# Altium PCB EyeGait.PcbDoc
Units mm, origin at the board's own origin, x right, y up, seen from the top; angles counter-clockwise.
Board outline 30 x 30 mm, 4 copper layers (Top Layer, GND, VCC, Bottom Layer), stack 1.616 mm thick; 46 components, 38 nets, 185 pads, 5 vias.
Unrouted connection lines stored in the file: 124.
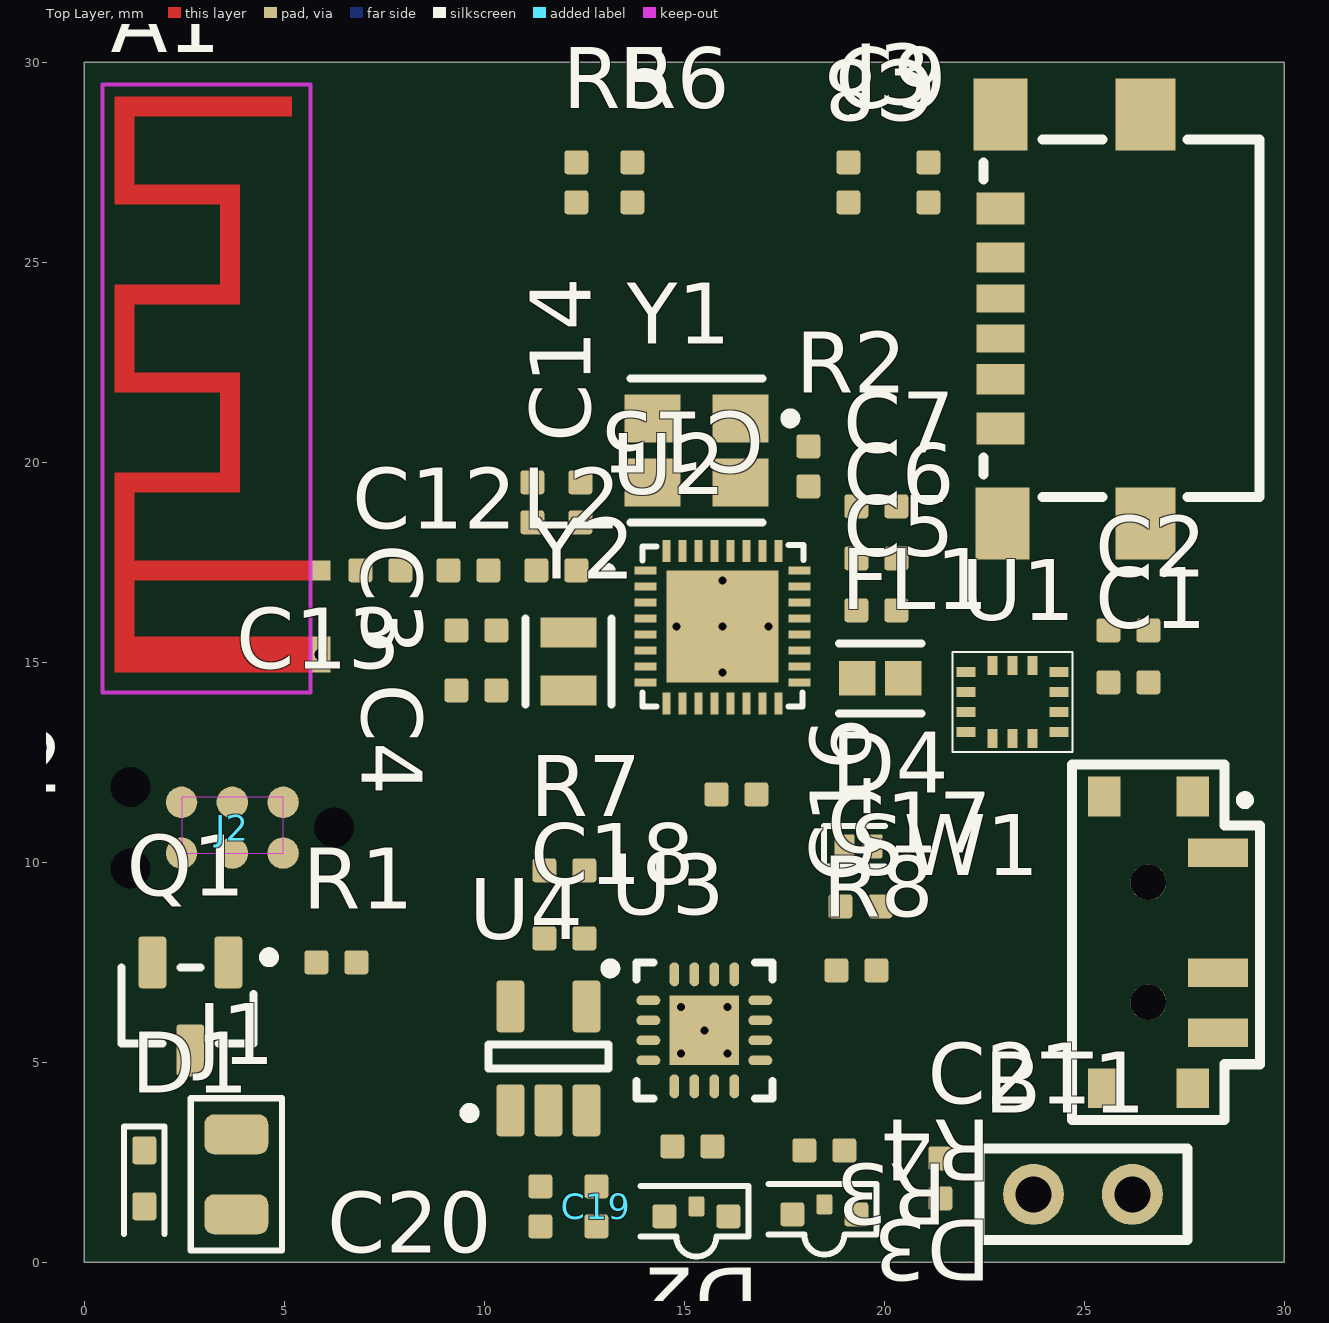
[diagram p0: Top Layer view]
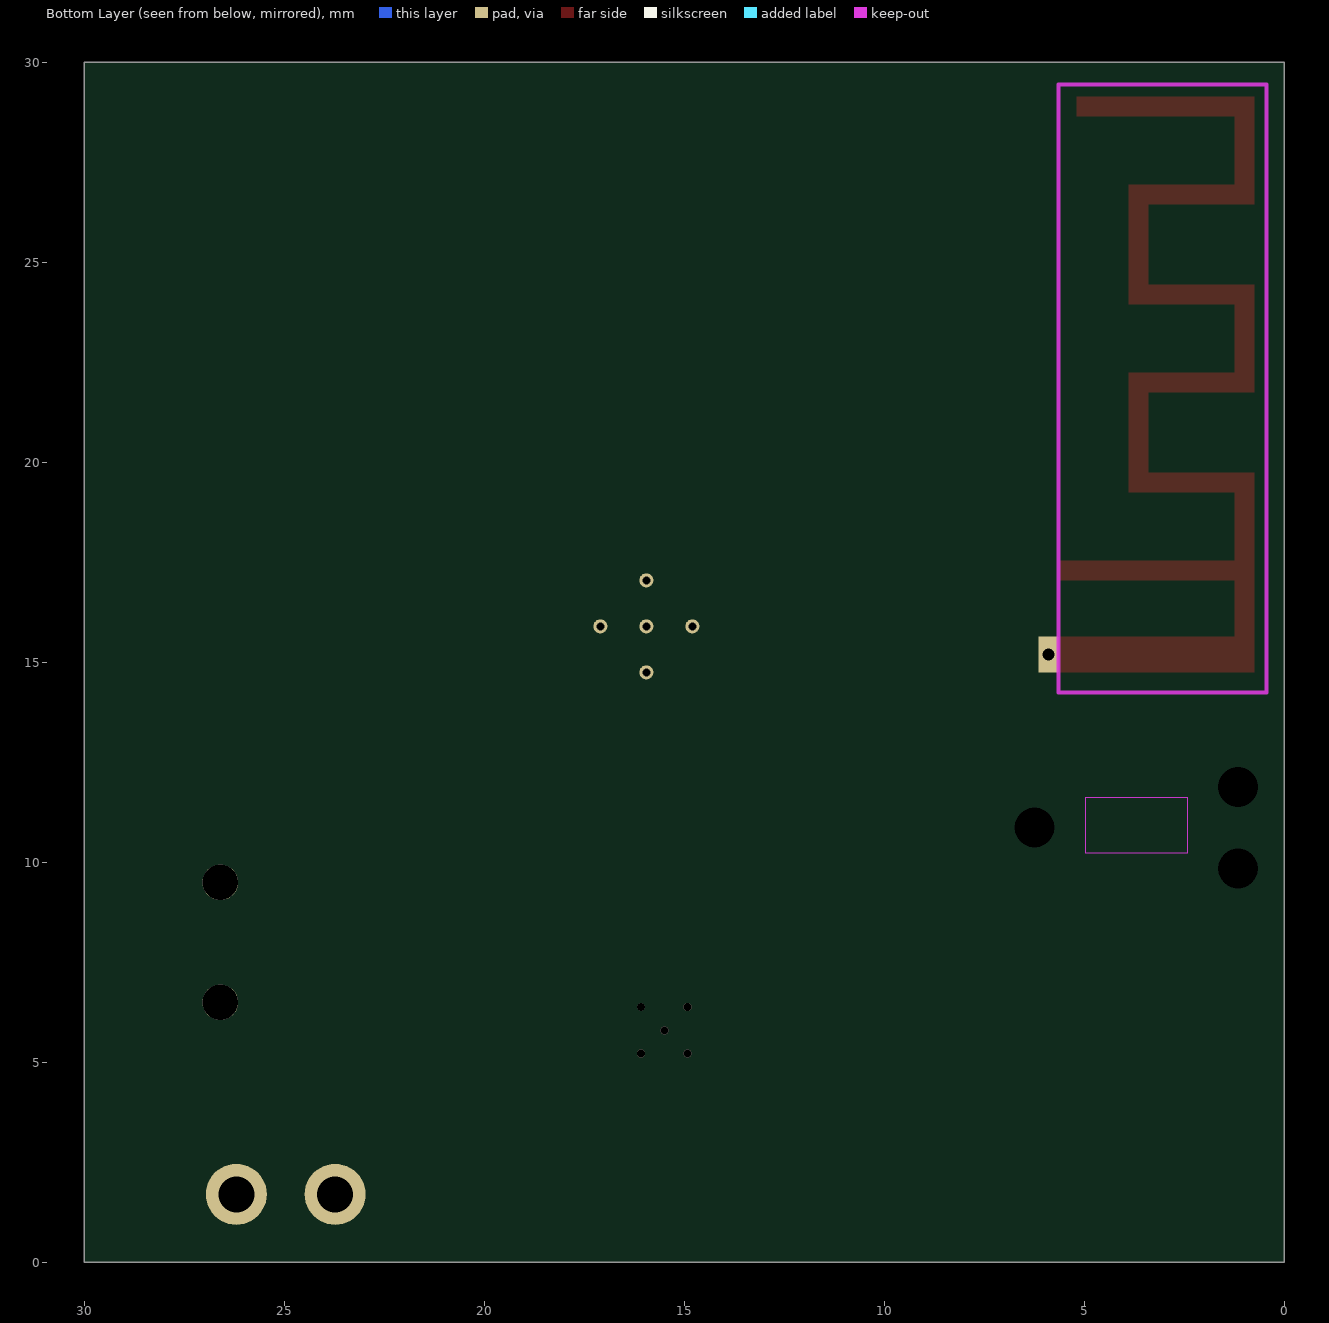
[diagram p1: Bottom Layer view, seen from below]
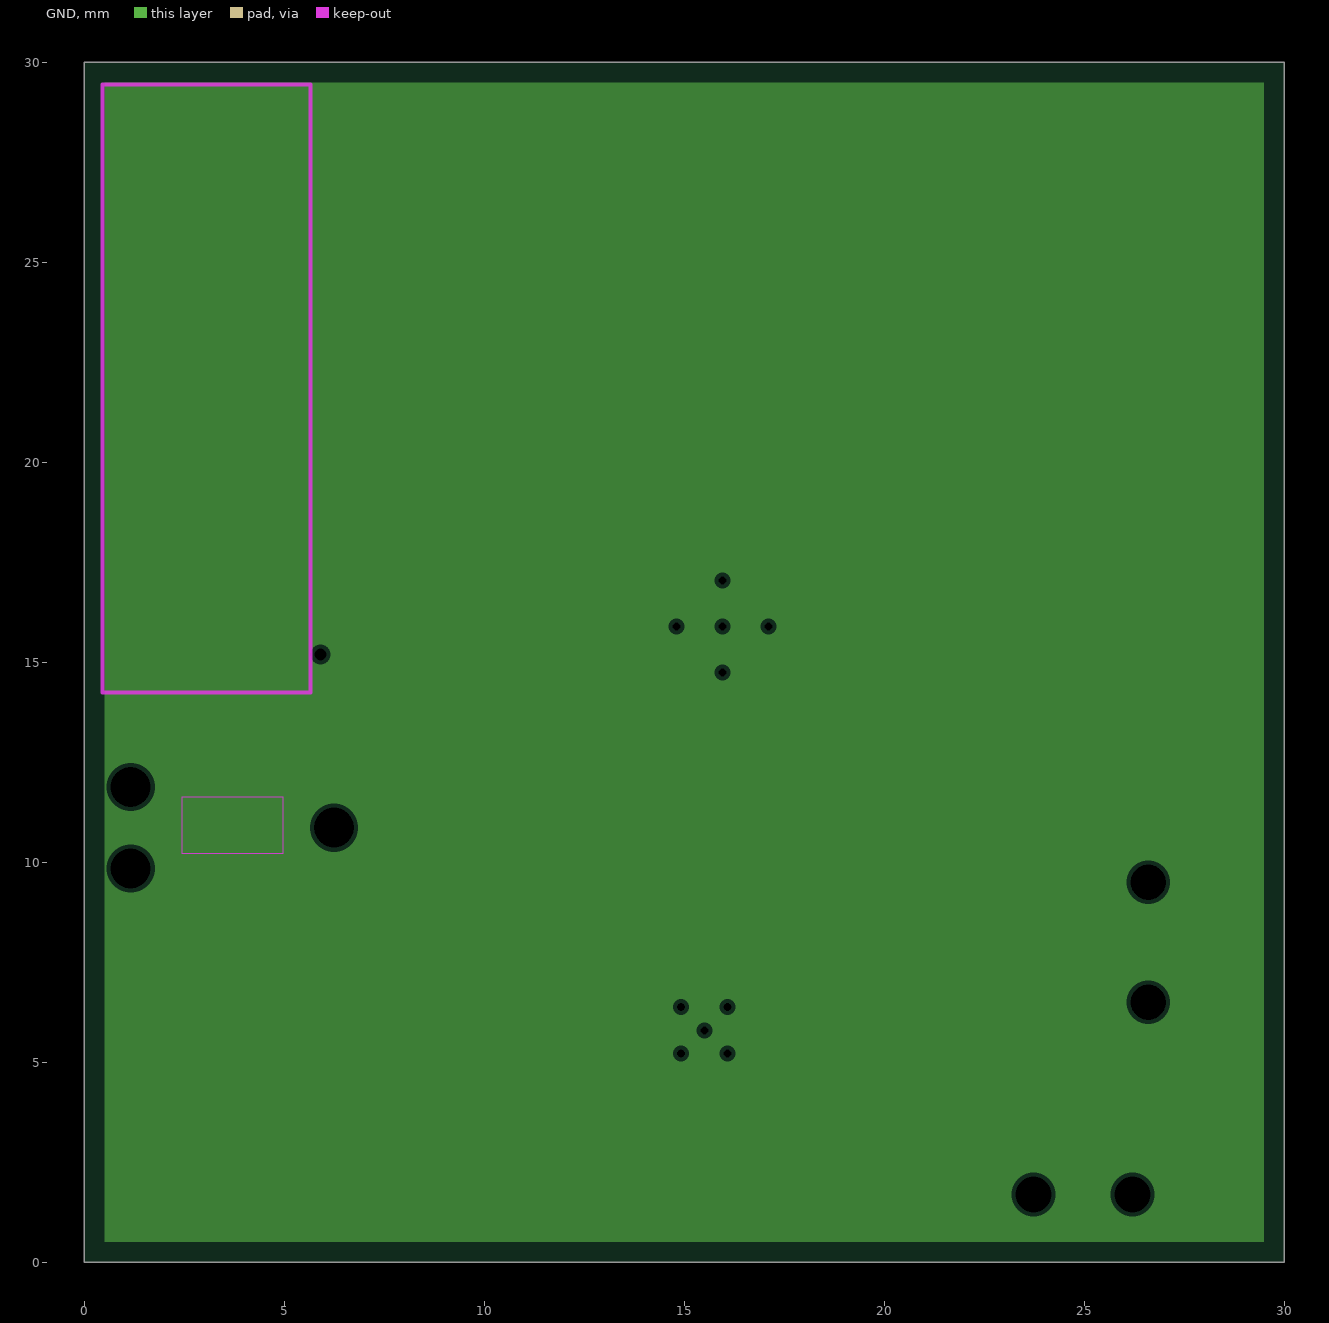
[diagram p2: GND, clearances drawn from the general rule]
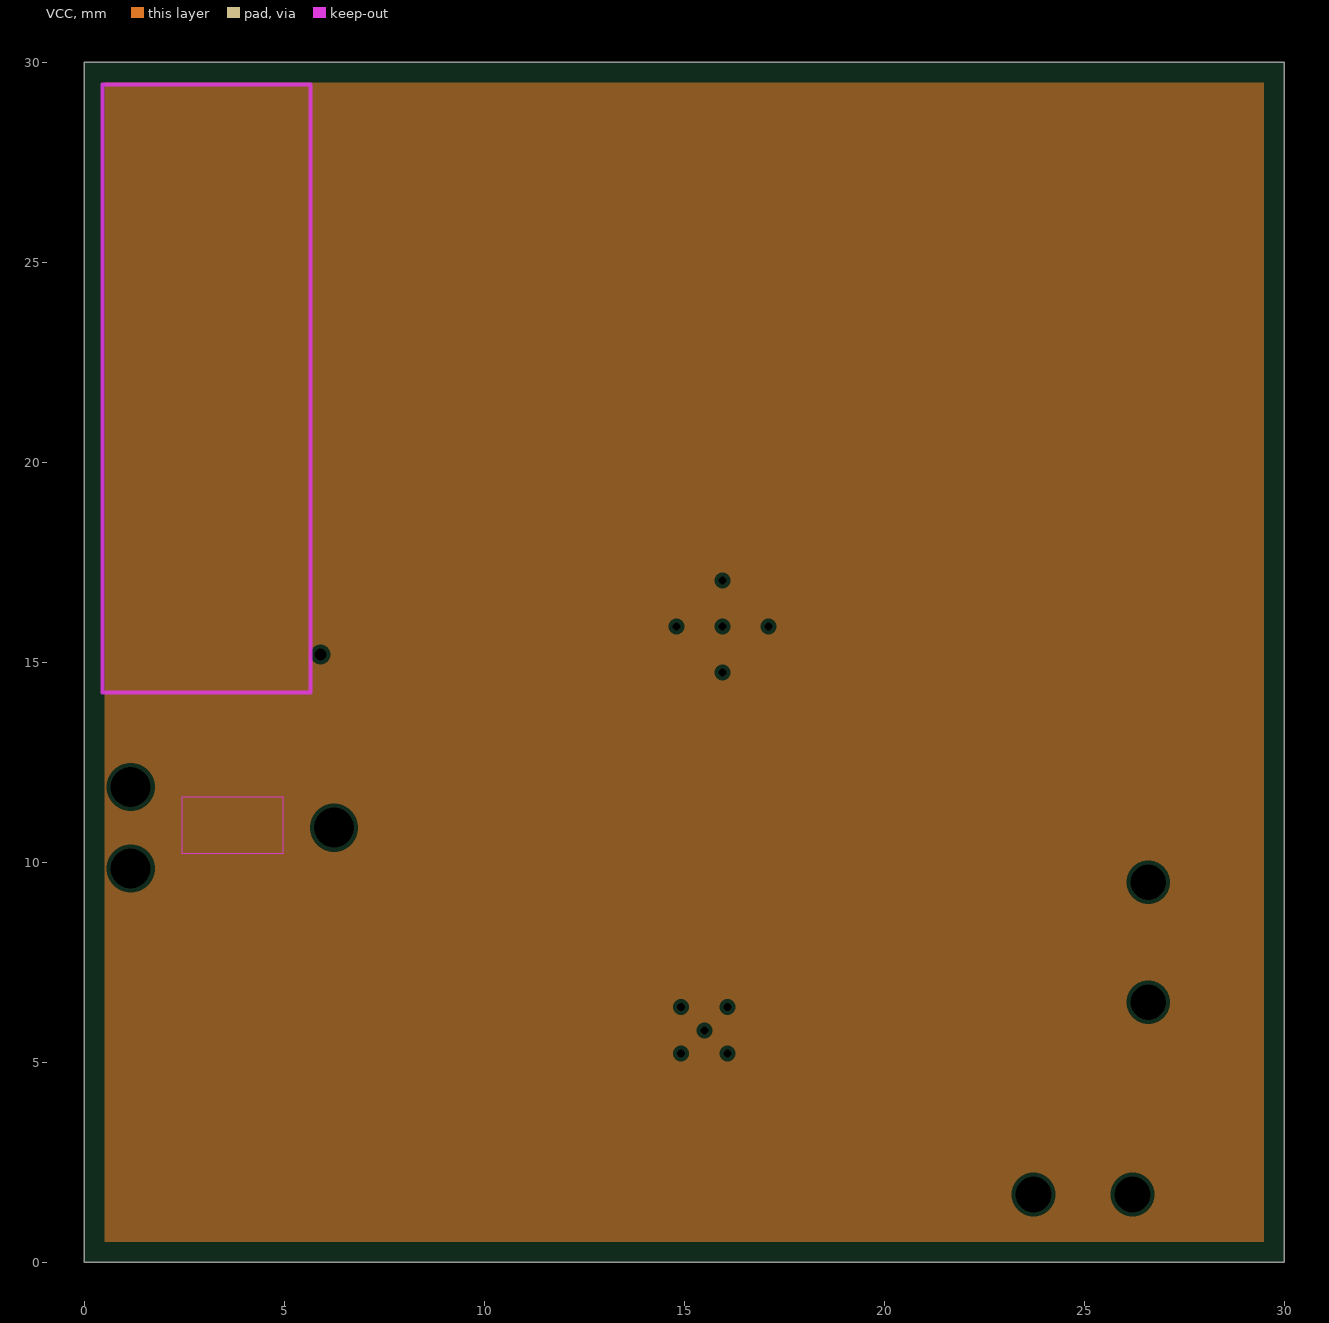
[diagram p3: VCC, clearances drawn from the general rule]

## Layer stack, top to bottom
Top Solder: solder mask 0.0102, Solder Resist, Dk 3.5
Top Layer: signal copper 0.0356
Dielectric 2: prepreg 0.137, PP-006, Dk 4.1
GND: plane copper 0.0356
Dielectric 1: dielectric 1.2, FR-4, Dk 4.8
VCC: plane copper 0.0356
Dielectric 3: prepreg 0.137, PP-006, Dk 4.1
Bottom Layer: signal copper 0.0356
Bottom Solder: solder mask 0.0102, Solder Resist, Dk 3.5

## Board outline
0,0 0,30 30,30 30,0

## Design rules (kind name [scope] priority, off if disabled: settings)
BoardOutlineClearance [All] p1: gap=0.2 ignorepadtopadclearanceinfootprint=FALSE
Clearance [All] p1: gap=0.102 ignorepadtopadclearanceinfootprint=TRUE except(0.1: Arc-Arc Arc-Track Track-Track; 0.127: Arc-Via Track-Via SMDPad-Via THPad-Via Via-Via Via-Fill Via-Poly Via-Region Via-Text; 0.254: Arc-Hole Track-Hole SMDPad-Hole THPad-Hole Via-Hole Fill-Hole Poly-Hole Region-Hole Text-Hole)
ComponentClearance [All] p1: gap=0.102 collisioncheckmode=3 verticalgap=0.102 showdistances=TRUE
DiffPairsRouting [All] p1: maxlimit=0.102 minlimit=0.102 mostfreqgap=0.102 toplayer_minwidth=0.102 toplayer_maxwidth=1816.048 toplayer_prefwidth=0.102 bottomlayer_minwidth=0.102 bottomlayer_maxwidth=1816.048 bottomlayer_prefwidth=0.102 maxuncoupledlength=12.7
Height [All] p1: minheight=0 maxheight=1816.048 prefheight=12.7
HoleSize [All] p1: absolutevalues=TRUE maxlimit=6.3 minlimit=0.2 maxpercent=80.000 minpercent=20.000
HoleToHoleClearance [All] p1: gap=0.406 allowstackedmicrovias=FALSE
MinimumAnnularRing [All] p1: minimumring=0.152
MinimumSolderMaskSliver [All] p1: minsoldermaskwidth=0.152
PlaneClearance [All] p1: clearance=0.102
PlaneConnect PlaneConnectPowerPads [InPadClass('PowerPads')] p1: planeconnectstyle=Direct reliefexpansion=0.508 reliefentries=4 reliefconductorwidth=0.254 reliefairgap=0.254
PlaneConnect [All] p2: pad.planeconnectstyle=Relief pad.reliefexpansion=0.3 pad.reliefentries=4 pad.reliefconductorwidth=0.102 pad.reliefairgap=0.102 via.planeconnectstyle=Direct via.reliefexpansion=0.3 via.reliefentries=4 via.reliefconductorwidth=0.127 via.reliefairgap=0.127
PolygonConnect PolygonConnectPowerPads [All vs (InPadClass('PowerPads'))] p1: connectstyle=Direct reliefconductorwidth=0.254 reliefentries=4 polygonreliefangle="90 Angle" airgapwidth=0.254
PolygonConnect [All] p2: thpad.connectstyle=Relief thpad.reliefconductorwidth=0.102 thpad.reliefentries=4 thpad.polygonreliefangle="90 Angle" thpad.airgapwidth=0.102 smdpad.connectstyle=Relief smdpad.reliefconductorwidth=0.102 smdpad.reliefentries=4 smdpad.polygonreliefangle="90 Angle" smdpad.airgapwidth=0.102 via.connectstyle=Direct via.reliefconductorwidth=0.127 via.reliefentries=4 via.polygonreliefangle="90 Angle" via.airgapwidth=0.127
RoutingVias [All] p1: holewidth=0.2 width=0.45 viastyle="Through Hole" minholewidth=0.2 minwidth=0.45 maxholewidth=6.3 maxwidth=6.55
SilkToSilkClearance [All] p1: silktosilkclearance=0.127
SilkToSolderMaskClearance [IsPad] p1: minsilkscreentomaskgap=0.127 clearancetoexposedcopper=TRUE
SolderMaskExpansion [All] p1: expansion=0.051 istentingtop=FALSE
UnRoutedNet [All] p1: checkbadconnections=TRUE
Width Power_20mil [All] p1: maxlimit=25.4 minlimit=0.508 preferedwidth=0.508 minimp=50.000000 maximp=50.000000 favimp=50.000000
Width Power_12mil [All] p2: maxlimit=25.4 minlimit=0.305 preferedwidth=0.305 minimp=50.000000 maximp=50.000000 favimp=50.000000
Width Width_10mil [All] p3: maxlimit=25.4 minlimit=0.254 preferedwidth=0.254 minimp=50.000000 maximp=50.000000 favimp=50.000000
Width Width_6mil [All] p4: maxlimit=25.4 minlimit=0.152 preferedwidth=0.152 minimp=50.000000 maximp=50.000000 favimp=50.000000
Width Width_4mil [All] p5: maxlimit=25.4 minlimit=0.102 preferedwidth=0.102 minimp=50.000000 maximp=50.000000 favimp=50.000000
19 further rules are at their usual default settings.

## Classes and differential pairs
component class Sensors&Actuators: C1 C2 D1 J1 Q1 R1 U1
component class Power: BT1 C17 C18 C19 C20 C21 D2 D3 D4 J3 R3 R4 R5 R6 R7 R8 SW1 U3 U4
component class MCU: A1 C3 C4 C5 C6 C7 C8 C9 C12 C13 C14 C15 C16 FL1 J2 L2 R2 U2 Y1 Y2

## Components (designator, comment, footprint, x,y, rotation, side; value= is the part's Value field where it differs from the comment)
A1 "Antena_IFA" ANTENA_IFA 5.65,14.75 r90 top
BT1 "Battery" "Hand Solder Cable" 23.73,1.7 r0 top
C1 "100 nF" C0402 26.1,14.5 r0 top
C2 "100 nF" C0402 26.1,15.8 r0 top
C3 "15 pF" C0402 9.8,15.8 r0 top
C4 "15 pF" C0402 9.8,14.3 r0 top
C5 "100 nF" C0402 19.8,16.3 r0 top
C6 "100 nF" C0402 19.8,17.6 r0 top
C7 "10 uF" C0402 19.8,18.9 r0 top
C8 "100 nF" C0402 21.1,27 r90 top
C9 "10 uF" C0402 19.1,27 r90 top
C12 "12 pF" C0402 9.6,17.3 r180 top
C13 "12 pF" C0402 7.4,17.3 r180 top
C14 "1.2 pF" C0402 11.2,19 r270 top
C15 "1.2 pF" C0402 12.4,19 r270 top
C16 "1 uF" C0402 16.3,11.7 r180 top
C17 "1uF" C0402 19.4,8.9 r0 top
C18 "1uF" C0402 12,8.1 r180 top
C19 "4.7uF" C0402 12.8,1.4 r270 top
C20 "1uF" C0402 11.4,1.4 r270 top
C21 "4.7uF" C0402 21.4,2.1 r90 top
D1 "BAT43XV2" SOD_523 1.5,2.1 r270 top
D2 "155060RS73200" LED_Side_0603 15.3,1.15 r180 top
D3 "155060GS73200" LED_Side_0603 18.5,1.2 r180 top
D4 "PESD7V0L1BSLAZ" DFN1006-2/SOD882 19,10.4 r0 top
FL1 "BLM18HE152SN1D" FP-BLM18-0_15-t0_8-IPC_C 19.9,14.6 r180 top
J1 "Motor" Motor 3.8,2.2 r270 top
J2 "Conn2x3" Pogo_6pins_minimum 6.24,10.865 r180 top
J3 "USB_C_6" USB4135-GF-A 22.955,18.475 r90 top
L2 "2 nH" L0402 11.8,17.3 r180 top
Q1 "S8050" SOT23 3.6,7.5 r180 top
R1 "5.1 K" R0402 6.3,7.5 r180 top
R2 "100 k" R0402 18.1,19.9 r270 top
R3 "220" R0402 15.2,2.9 r0 top
R4 "220" R0402 18.5,2.8 r0 top
R5 "5.1K" R0402 12.3,27 r90 top
R6 "5.1K" R0402 13.7,27 r90 top
R7 "10K" R0402 12,9.8 r180 top
R8 "18K" R0402 19.3,7.3 r180 top
SW1 "PCM12SMTR" PCM12SMTR 26.6,8 r270 top
U1 "LSM6DSM-LGA-14L" LSM6DSM-LGA-14L-v2 21.7,12.762 r0 top
U2 "CC2640" CC2640R2FRSM 15.95,15.9 r0 top
U3 "BQ24232" QFN50P300X300X100_HS-17N 15.5,5.8 r0 top
U4 "MIC5504-3.3YM5-TR" SOT23-5 12.55,6.4 r180 top
Y1 "ABM8AIG-24.000MHZ-12-2Z-T3" FP-ABM8AIG-MFG 15.3,20.3 r180 top
Y2 "ABS06-32.768KHZ-9-1-T" FP-ABS06-MFG 12.1,15.025 r270 top

## Footprints (in the part's own frame and the unit in brackets; to place one, negate y for a bottom-side part, rotate by r counter-clockwise, add the part's x,y. Pads: shape width x height; smd on the part's side, far side on the other; paste and mask are expansions set on the pad)
ANTENA_IFA [mm]
  rect 0.5x0.5 smd mask+0.102: 0(2.55,-0.25)
  rect 0.9x0.5 hole 0.3 mask+0.102: 1(0.45,-0.25)
  Top Layer region: 5,1.76 7,1.76 7,2.26 5,2.26
  Top Layer region: 4.5,1.76 5,1.76 5,4.4 4.5,4.4
  Top Layer region: 0.001,4.401 5.001,4.401 5.001,4.901 0.001,4.901
  Top Layer region: 2.3,0 2.8,0 2.8,4.4 2.3,4.4
  Top Layer region: 7,1.76 7.5,1.76 7.5,4.4 7,4.4
  Top Layer region: 7.001,4.401 9.701,4.401 9.701,4.901 7.001,4.901
  Top Layer region: 9.2,1.76 9.7,1.76 9.7,4.4 9.2,4.4
  Top Layer region: 9.7,1.76 11.7,1.76 11.7,2.26 9.7,2.26
  Top Layer region: 11.7,1.76 12.2,1.76 12.2,4.4 11.7,4.4
  Top Layer region: 11.701,4.401 14.401,4.401 14.401,4.901 11.701,4.901
  Top Layer region: 13.9,0.46 14.4,0.46 14.4,4.4 13.9,4.4
  Top Layer region: 0,0 0.9,0 0.9,4.4 0,4.4
  Keep-Out Layer lines w0.1: -0.5,5.2 -0.5,0 14.7,0 14.7,5.2 -0.5,5.2
C0402 [mm]
  rrect25% 0.6x0.6 smd: 1(-0.5,0) 2(0.5,0)
  body extent -0.5,-0.25 0.5,0.25, height 0.5
CC2640R2FRSM [mm]
  rect 0.55x0.2 smd paste+0 mask+0.05: 1(-1.925,1.4) 2(-1.925,1) 3(-1.925,0.6) 4(-1.925,0.2) 5(-1.925,-0.2) 6(-1.925,-0.6) 7(-1.925,-1) 8(-1.925,-1.4) 17(1.925,-1.4) 18(1.925,-1) 19(1.925,-0.6) 20(1.925,-0.2) 21(1.925,0.2) 22(1.925,0.6) 23(1.925,1) 24(1.925,1.4)
  rect 0.2x0.55 smd paste+0 mask+0.05: 9(-1.4,-1.925) 10(-1,-1.925) 11(-0.6,-1.925) 12(-0.2,-1.925) 13(0.2,-1.925) 14(0.6,-1.925) 15(1,-1.925) 16(1.4,-1.925) 25(1.4,1.885) 26(1,1.885) 27(0.6,1.885) 28(0.2,1.885) 29(-0.2,1.885) 30(-0.6,1.885) 31(-1,1.885) 32(-1.4,1.885)
  round 0.35 hole 0.2: 33(-1.15,0) 33(0,-1.15) 33(0,0) 33(0,1.15) 33(1.15,0)
  rect 2.8x2.8 smd paste+0 mask+0.05: 33(0,0)
  silkscreen extent -2.9,-2 2.03,2.03, body extent -2,-2 2,2, height 1.1
DFN1006-2/SOD882 [mm]
  rrect15% 0.5x0.6 smd: 1(0,0) 2(0.7,0)
  silkscreen extent -0.51,-0.51 1.02,0.51, body extent -0.15,-0.3 0.85,0.3, height 0.41
FP-ABM8AIG-MFG [mm]
  rect 1.4x1.2 smd paste+0 mask+0: 1(-1.1,-0.8) 2(1.1,-0.8) 3(1.1,0.8) 4(-1.1,0.8)
  silkscreen extent -2.48,-1.8 1.65,1.8, body extent -1.9,-1.5 1.9,1.5, height 0.25
FP-ABS06-MFG [mm]
  rect 0.75x1.4 smd paste+0 mask+0: 1(-0.725,0) 2(0.725,0)
  silkscreen extent -1.07,-1.07 1.07,1.07, body extent -1.2,-0.8 1.2,0.8, height 0.25
FP-BLM18-0_15-t0_8-IPC_C [mm]
  rect 0.906x0.858 smd paste+0 mask+0: 1(-0.576,0) 2(0.576,0)
  silkscreen extent -1.03,-0.87 1.03,0.87, body extent -1.13,-0.58 1.13,0.58, height 0.25
"Hand Solder Cable" [mil]
  round 60 hole 35.43: 1(0,0) 2(97.24,0)
  silkscreen extent -53,-45 152,45
L0402 [mm]
  rrect25% 0.6x0.6 smd: 1(-0.5,0) 2(0.5,0)
  body extent -0.5,-0.25 0.5,0.25, height 0.5
LED_Side_0603 [mm]
  rrect25% 0.4x0.5 smd: 0(0,-0.25)
  rrect25% 0.6x0.6 smd: 1(-0.8,0) 2(0.8,0)
  silkscreen extent -1.3,-0.76 1.4,1.01, body extent -0.8,-0.15 0.8,0.85, height 0.6
LSM6DSM-LGA-14L-v2 [mm]
  rect 0.475x0.25 smd: 1(0.337,2) 2(0.337,1.5) 3(0.337,1) 4(0.337,0.5) 8(2.662,0.5) 9(2.662,1) 10(2.662,1.5) 11(2.662,2)
  rect 0.25x0.475 smd: 5(1,0.338) 6(1.5,0.338) 7(2,0.338) 12(2,2.163) 13(1.5,2.163) 14(1,2.163)
  silkscreen extent 0,0 3,2.5, body extent 0.02,0.02 3.02,2.52, height 0.78
Motor [mm]
  rrect50% 1x1.6 smd: 0(-1,0) 1(1,0)
  silkscreen extent -1.91,-1.14 1.91,1.14
PCM12SMTR [mil]
  rect 28x59 smd: 1(-88,68.5) 2(30,68.5) 3(89,68.5)
  rect 39x32 smd: SH(-143.5,-43.5) SH(-143.5,43.5) SH(143.5,-43.5) SH(143.5,43.5)
  round 35 hole 35 unplated: ""(-59,0) ""(59,0)
  silkscreen extent -175,-75 175,110, body extent -152,-110 152,86, height 59
Pogo_6pins_minimum [mil]
  round 31 smd mask-196.85: 1(50,25) 2(100,25) 3(150,25) 4(50,-25) 5(100,-25) 6(150,-25)
  round 31.5 hole 39.37 unplated: ""(0,0) ""(200,-39.96) ""(200,40)
  Keep-Out Layer region: 50,-30.01 150,-30.01 150,24.99 50,24.99
QFN50P300X300X100_HS-17N [mm] "QFN, 16-Leads, Body 3,00x3,00mm, Pitch 0,50mm, Thermal Pad 1,74x1,74mm, IPC Medium Density"
  oval 0.6x0.24 smd: 1(-1.4,0.75) 2(-1.4,0.25) 3(-1.4,-0.25) 4(-1.4,-0.75) 9(1.4,-0.75) 10(1.4,-0.25) 11(1.4,0.25) 12(1.4,0.75)
  oval 0.24x0.6 smd: 5(-0.75,-1.4) 6(-0.25,-1.4) 7(0.25,-1.4) 8(0.75,-1.4) 13(0.75,1.4) 14(0.25,1.4) 15(-0.25,1.4) 16(-0.75,1.4)
  rect 1.74x1.74 smd: 17(0,0)
  silkscreen extent -2.47,-1.7 1.7,1.7, body extent -1.6,-1.6 1.6,1.6, height 1
R0402 [mm]
  rrect25% 0.6x0.6 smd: 1(-0.5,0) 2(0.5,0)
  body extent -0.5,-0.25 0.5,0.25, height 0.35
SOD_523 [mm]
  rrect25% 0.7x0.6 smd: 1(-0.7,0) 2(0.7,0)
  silkscreen extent -1.3,-0.51 1.4,0.51, body extent -0.8,-0.4 0.8,0.4, height 0.63
SOT23 [mm]
  rrect25% 0.7x1.3 smd: 1(0,0) 2(1.9,0) 3(0.95,2.2)
  silkscreen extent -1.14,-0.25 2.67,2.03, body extent -0.55,-0.11 2.45,2.39, height 1.2
SOT23-5 [mm]
  rrect25% 0.7x1.3 smd: 1(1.9,2.6) 2(0.95,2.6) 3(0,2.6) 4(1.9,0) 5(0,0)
  silkscreen extent -0.55,0.95 3.05,2.79, body extent -0.5,-0.1 2.4,2.7, height 1.55
USB4135-GF-A [mm] "USB 2.0 Type C connector for power only."
  rect 0.7x1.2 smd: A5(4.625,0.055) B5(5.625,0.055)
  rect 0.76x1.2 smd: A9(6.645,0.055) B9(3.605,0.055)
  rect 0.8x1.2 smd: A12(7.875,0.055) B12(2.375,0.055)
  rect 1.8x1.35 smd: SHIELD(0,0) SHIELD(10.22,0.049)
  rect 1.8x1.5 smd: SHIELD(0,-3.58) SHIELD(10.22,-3.58)
  silkscreen extent 0.65,-6.43 9.59,0.47, body extent -0.44,-6.43 10.7,0.47, height 3.26

## Part data
BT1: "Multicell Battery"
C1 C2 C3 C4 C5 C6 C7 C8 C9 C12 C13 C14 C15 C16 C17 C18 C20 C21: library part C, "Capacitor"
C19: library part C, "Capacitor", Voltage=>10V
D1: library part "D Schottky", "Schottky Diode"
D2: library part LED_R, "Red LED"
D3: library part LED_G, "Green LED"
D4: library part "D Zener_Bidirectional", "Zener Diode Bidirectional"
FL1: library part CMP-0686-00368-3, "Chip Ferrite Bead, 0603, 1500Ω @ 100MHz, 0.5Ω, 25%, 500mA", Case Code (Imperial)=0603, Case Code (Metric)=1608, Current Rating=500mA, DC Resistance (DCR)=500mR, Max Operating Temperature=125°C, Min Operating Temperature=-55°C, Package Quantity=1, Test Frequency=100MHz, Tolerance=25%, Case/Package=0603, Core Material=Ferrite, DC Current=500mA, Depth=0.8mm, Height=0.8mm, Impedance=1.5kR, Lead Free="Lead Free", Length=1.6mm, Material=Ferrite, Max Current Rating=500mA, Max DC Current=500mA, Military Standard=Not, Number of Circuits=1, Number of Lines=1, Number of Pins=2, Packaging="Tape and Reel", Radiation Hardening=No, REACH SVHC="No SVHC", Termination=SMD/SMT, Width=0.8mm
J2: "2x3 pin Terminal"
J3: "USB-C 6 pin connector for power only. 20V/3A"
L2: library part L, "Inductor"
Q1: library part NPN, "NPN Bipolar Transistor"
R1 R2 R3 R4 R5 R6 R7 R8: library part R, "Resistor"
U1: "6-axis IMU, Accel&Gyro"
U2: "IC RF TXRX+MCU BLUETOOTH 32VFQFN", Manufacturer="Texas Instruments", Part number=CC2640R2FRSM, Supplier Part Number 1=595-CC2640R2FRSMR, Supplier 1=Mouser
U3: "Power management IC. USB-Friendly Lithium-Ion Battery Charger And Power-Path Management IC"
Y1: library part CMP-27762-015716-1, "Crystal 24MHz ±20ppm (Tol) ±50ppm (Stability) 12pF FUND 50Ω Automotive 4-Pin Ultra Mini-CSMD T/R", Case/Package=SMD/SMT, ESR (Equivalent Series Resistance)=50R, Frequency=24MHz, Frequency Stability=50ppm, Frequency Tolerance=20ppm, Load Capacitance=12pF, Max Operating Temperature=125°C, Min Operating Temperature=-40°C, Ratings=AEC-Q200, Height=0.031inch, Length=0.126inch, Mount="Surface Mount", Packaging="Cut Tape", RoHS Compliant=Yes, Series=ABM8AIG, Width=0.098inch
Y2: library part CMP-27762-003430-2, "Crystal 32.768kHz ±10ppm (Tol) 9pF FUND 90kΩ 2-Pin Mini-CSMD T/R", Case/Package=CSMD, ESR (Equivalent Series Resistance)=90kR, Frequency=32.768kHz, Frequency Tolerance=10ppm, Load Capacitance=9pF, Max Operating Temperature=85°C, Min Operating Temperature=-40°C, Package Quantity=3000, Depth=1.2mm, Height=0.6mm, Length=2mm, Mount="Surface Mount", Number of Pins=2, Packaging="Tape and Reel", Radiation Hardening=No, REACH SVHC="No SVHC", RoHS Compliant=Yes, Series=ABS06, Series Resistance=90kR, Termination=SMD/SMT, Tolerance=10ppm, Width=1.2mm

## Via types
v1: diameter 0.2, hole 0.2, Top Layer to Bottom Layer, 5 vias

## Nets (pads, with @x,y where several pads share a name; then routed paths per layer and width w, separated by ;. In a path a pad name is that pad's centre, name@x,y a point inside that pad or via, vN(x,y) a via of type N, cw(c..) or ccw(c..) an arc to the next point about the centre after c; other vN are vias at no path point)
+3V3: C1.1 C2.1 C18.1 D1.2 FL1.2 J1.1 J2.1 U1.5 U1.8 U4.5
BAT: C21.1 SW1.2 U3.2 U3.3
GND: A1.1 BT1.2 C1.2 C2.2 C3.1 C4.1 C5.2 C6.2 C7.2 C8.2 C9.2 C14.1 C15.1 C16.1 C17.2 C18.2 C19.2 C20.2 C21.2 D4.1 J2.4 J3.A12 J3.B12 J3.SHIELD Q1.2 R5.1 R6.1 R7.2 R8.1 SW1.3 SW1.SH U1.2 U1.3 U1.6 U1.7 U1.12 U2.3 U2.7 U2.17 U2.20 U2.29 U2.33 U3.4 U3.5 U3.8 U3.14 U4.2 Y1.2 Y1.4
JTAG_TCKC: J2.2 U2.14
JTAG_TDI: J2.6 U2.16
JTAG_TDO: J2.5 U2.15
JTAG_TMSC: J2.3 U2.13
NetA1_0: A1.0 C13.2
NetBT1_1: BT1.1 SW1.1
NetC12_1: C12.1 C15.2 L2.2
NetC12_2: C12.2 C13.1
NetC16_2: C16.2 U2.12
NetC17_1: C17.1 D4.2 J3.A9 J3.B9 U3.13
NetC19_1: C19.1 C20.1 D2.1 D3.1 U3.6 U3.10 U3.11 U4.1 U4.3
NetD1_1: D1.1 J1.0 Q1.3
NetD2_2: D2.2 R3.1
NetD3_2: D3.2 R4.1
NetJ3_A5: J3.A5 R6.2
NetJ3_B5: J3.B5 R5.2
NetQ1_1: Q1.1 R1.2
NetR1_1: R1.1 U2.10
NetR2_2: R2.2 U2.21
NetR3_2: R3.2 U3.7
NetR4_2: R4.2 U3.9
NetR7_1: R7.1 U3.1
NetR8_2: R8.2 U3.16
NetU1_1: U1.1 U2.24
NetU1_4: U1.4 U2.25
NetU1_9: U1.9 U2.26
NetU1_13: U1.13 U2.22
NetU1_14: U1.14 U2.23
RF_P: C14.2 L2.1 U2.1
VDDR: C9.1 U2.28 U2.32
VDDS: C5.1 C6.1 C7.1 C8.1 FL1.1 R2.1 U2.11 U2.19 U2.27
X24M_N: U2.30 Y1.1
X24M_P: U2.31 Y1.3
X32K_Q1: C3.2 U2.5 Y2.1
X32K_Q2: C4.2 U2.6 Y2.2
pads on no net: D2.0 D3.0 J2. SW1. U1.10 U1.11 U2.2 U2.4 U2.8 U2.9 U2.18 U3.12 U3.15 U3.17 U4.4
copper on no net:
  other v1: 14.92,5.22 16.08,5.22 15.5,5.8 14.92,6.38 16.08,6.38

## Polygon pours and split planes (outlines as drawn)
no net on GND (split plane): 29.49,0.51 0.51,0.51 0.51,29.49 29.49,29.49
no net on VCC (split plane): 29.49,0.51 0.51,0.51 0.51,29.49 29.49,29.49